# Altium PCB busanaliz02.PcbDoc (part 2 of 2)
Units mm, origin at the board's own origin, x right, y up, seen from the top; angles counter-clockwise.
Board outline 118.11 x 70.87 mm, 4 copper layers (Component Side, Ground Plane, Power Plane, Solder Side), stack 0.844 mm thick; 98 components, 86 nets, 476 pads, 172 vias.
Unrouted connection lines stored in the file: 1.
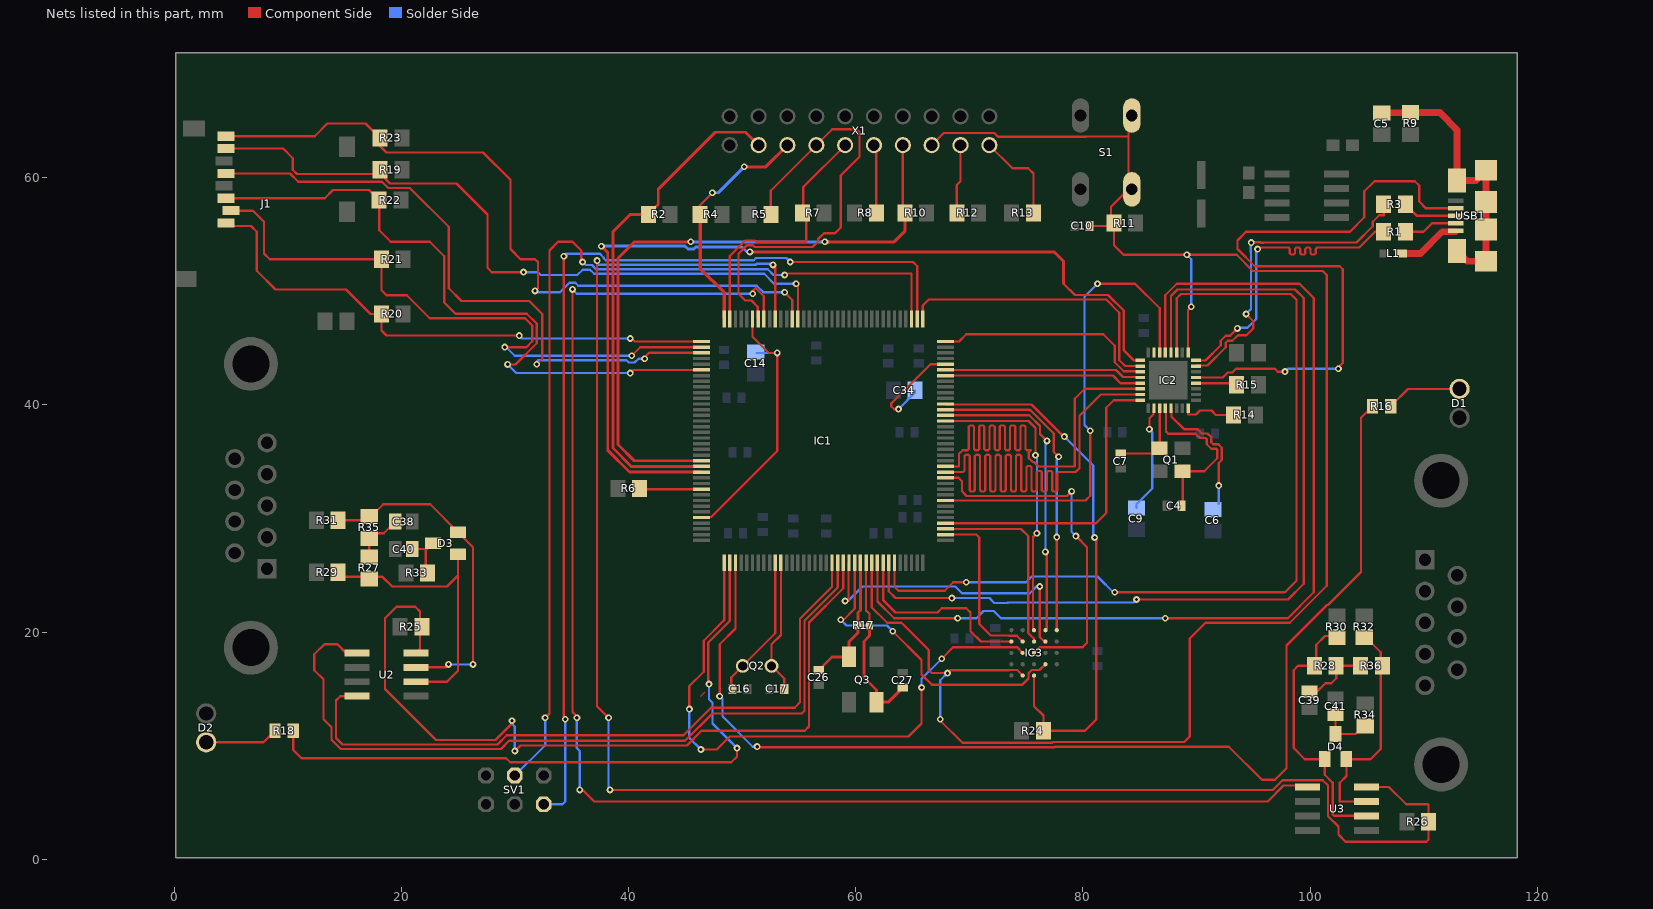
[diagram p4: the nets of this part, all layers, seen from the top]

## Via types
v1: diameter 0.6, hole 0.3, Component Side to Solder Side, 172 vias

## Nets (pads, with @x,y where several pads share a name; then routed paths per layer and width w, separated by ;. In a path a pad name is that pad's centre, name@x,y a point inside that pad or via, vN(x,y) a via of type N, cw(c..) or ccw(c..) an arc to the next point about the centre after c; other vN are vias at no path point) (continued)
FD1_CANTX: IC1.101 U3.1 | length 129.3
  Component Side w0.2: v1(35.052,50.165) 35.052,12.954 35.433,12.573 v1(35.433,12.446) ; v1(35.687,6.096) 35.941,6.096 36.957,5.08 96.266,5.08 97.663,6.477 U3.1@99.635,6.477 ; v1(50.927,49.784) 50.927,50.038 51.181,50.292 51.9,49.573 IC1.101@51.9,47.568
  Solder Side w0.2: v1(35.052,50.165) 34.925,50.292 35.433,49.784 v1(50.927,49.784) ; v1(35.433,12.446) 35.433,9.779 35.687,9.525 v1(35.687,6.096)
FD1_STBM: IC1.99 R26.1 U3.8 | length 154.1
  Component Side w0.2: v1(37.211,52.705) 37.211,13.462 v1(38.227,12.446) v1@38.227,12.573 ; v1(38.354,6.096) 96.716,6.096 97.575,6.955 101.122,6.955 101.581,6.496 101.581,3.771 102.489,2.863 102.489,2.159 103.124,1.524 110.236,1.524 110.424,1.712 R26.1@110.424,3.302 110.424,4.765 110.363,4.826 108.458,4.826 106.934,6.35 U3.8@104.978,6.35 ; v1(52.705,52.324) 52.705,52.451 52.9,52.256 IC1.99@52.9,47.568
  Solder Side w0.2: v1(37.211,52.705) 37.211,52.451 37.322,52.34 51.18,52.34 51.275,52.435 52.594,52.435 v1(52.705,52.324) ; v1(38.227,12.446) 38.227,6.223 v1(38.354,6.096)
FD2_CANRX: IC1.20 U2.4 | length 61.4
  Component Side w0.2: U2.4@16.069,14.351 14.605,14.351 14.224,13.97 14.224,10.668 14.797,10.095 28.441,10.095 29.249,10.903 44.812,10.903 47.244,13.335 54.61,13.335 55.08,13.805 55.08,21.159 57.9,23.979 IC1.20@57.9,26.092
FD2_CANTX: IC1.21 U2.1 | length 69.2
  Component Side w0.2: 13.808,11.635 13.116,12.327 13.116,15.84 12.319,16.637 12.319,18.034 13.208,18.923 14.351,18.923 U2.1@15.113,18.161 ; 13.824,11.619 13.824,10.502 14.631,9.695 28.745,9.695 29.464,10.414 44.958,10.414 47.371,12.827 55.245,12.827 55.48,13.062 55.48,20.994 58.4,23.914 IC1.21@58.4,26.092
FD2_STBM: IC1.22 R25.1 U2.8 | length 72.9
  Component Side w0.2: U2.8@21.285,18.161 21.628,18.504 21.628,21.806 21.209,22.225 19.558,22.225 18.542,21.209 18.542,14.979 23.026,10.495 28.275,10.495 29.718,11.938 v1(29.718,12.192) ; v1(29.972,9.525) 30.461,10.014 45.124,10.014 46.413,11.303 55.499,11.303 55.88,11.684 55.88,20.828 58.9,23.848 IC1.22@58.9,26.092
  Solder Side w0.2: v1(29.718,12.192) 29.591,12.065 29.972,11.684 v1(29.972,9.525)
JNTRST: IC1.131 R2.1 X1.3 | length 45.2
  Component Side w0.254: IC1.131@46.412,34.58 40.223,34.58 38.608,36.195 38.608,55.245 40.132,56.769 R2.1@41.722,56.769 42.596,57.643 42.596,58.979 47.625,64.008 50.292,64.008 X1.3@51.435,62.865
JTCLK: IC1.107 R7.2 X1.9 | length 22.5
  Component Side w0.2: IC1.107@48.9,47.568 48.9,53.108 50.259,54.467 51.087,54.467 51.198,54.356 55.626,54.356 R7.2@55.626,56.566 ; R7.2@55.372,56.972 55.372,59.182 X1.9@59.055,62.865
JTDI: IC1.108 R4.1 X1.5 | length 20.7
  Component Side w0.2: R4.1@46.482,56.957 46.228,57.211 46.228,57.531 v1(47.371,58.674)
  Component Side w0.254: v1(50.165,60.96) 52.07,60.96 X1.5@53.975,62.865
  Component Side w0.3: R4.1@46.294,56.769 46.294,52.004 48.4,49.898 IC1.108@48.4,47.568
  Solder Side w0.2: v1(47.371,58.674) 47.879,58.674
  Solder Side w0.254: 47.879,58.674 v1(50.165,60.96)
JTDO: IC1.130 R10.2 X1.13 | length 58.7
  Component Side w0.2: X1.13@64.135,62.865 64.135,57.074 R10.2@64.313,56.896
  Component Side w0.254: v1@45.593,54.356 v1(45.466,54.356) 40.513,54.356 39.062,52.905 39.062,36.503 40.485,35.08 IC1.130@46.412,35.08 ; v1(57.277,54.356) 63.373,54.356 64.313,55.296 R10.2@64.313,56.896
  Solder Side w0.254: v1(45.466,54.356) v1(57.277,54.356) 57.658,54.356
JTMS: IC1.102 R5.1 X1.7 | length 38.3
  Component Side w0.2: IC1.102@51.4,47.568 51.35,47.618 51.35,48.647 50.813,49.184 50.257,49.184 49.657,49.784 49.657,53.3 50.424,54.067 50.922,54.067 51.095,53.894 56.18,53.894 56.677,54.391 56.677,54.605 57.19,55.118 58.166,55.118 58.674,55.626 58.674,60.198 60.325,61.849 60.325,64.008 60.071,64.262 57.912,64.262 X1.7@56.515,62.865 52.512,58.862 R5.1@52.512,56.769
LED0: IC1.3 R16.1 | length 101.7
  Component Side w0.2: v1(48.006,14.351) 48.006,18.923 49.4,20.317 IC1.3@49.4,26.092 ; v1(51.308,9.906) 51.373,9.841 77.465,9.841 77.53,9.906 92.837,9.906 95.758,6.985 96.901,6.985 97.917,8.001 97.917,18.814 101.476,22.373 101.58,22.373 104.486,25.278 104.486,38.865 R16.1@105.499,39.878
  Solder Side w0.2: v1(48.006,14.351) 48.26,14.097 48.26,12.573 50.927,9.906 v1(51.308,9.906)
LED1: IC1.2 R18.1 | length 60.3
  Component Side w0.2: R18.1@10.452,11.303 10.452,9.614 11.176,8.89 29.193,8.89 29.558,8.525 49.038,8.525 49.53,9.017 v1(49.53,9.779) ; v1(47.068,15.416) 47.009,15.475 47.009,19.069 48.9,20.96 IC1.2@48.9,26.092
  Solder Side w0.2: v1(47.068,15.416) 47.068,14.077 47.371,13.774 47.371,11.938 v1(49.53,9.779)
NetC4_2: C4.2 IC2.28 Q1.3 | length 14.7
  Component Side w0.2: IC2.28@87.253,39.714 87.303,39.664 87.303,37.665 87.503,37.465 89.916,37.465 90.297,37.084 90.805,37.084 90.892,36.997 90.892,36.54 91.302,36.13 91.759,36.13 91.821,36.068 91.821,35.306 90.678,34.163 Q1.3@88.773,34.163 C4.2@88.773,31.217
NetC5_1: C5.1 R9.2 USB1.PAD1 USB1.PAD2 USB1.PAD3 USB1.PAD4 USB1.PAD5 USB1.PAD6 | length 25.6
  Component Side w0.6: C5.1@106.299,65.72 108.824,65.72 R9.2@108.839,65.735 111.43,65.735 112.941,64.224 USB1.PAD2@112.941,59.766 114.602,59.766 USB1.PAD6@115.491,60.655 USB1.PAD5@115.491,57.861 USB1.PAD4@115.491,55.442 USB1.PAD3@115.491,52.642 113.841,52.642 USB1.PAD1@112.941,53.542
NetC6_1: C6.1 IC2.29 | length 11.6
  Component Side w0.2: IC2.29@87.753,39.714 87.803,39.664 87.803,38.948 88.886,37.865 90.082,37.865 90.463,37.484 90.971,37.484 91.292,37.162 91.292,36.706 91.468,36.53 91.925,36.53 92.221,36.234 92.221,35.14 91.948,34.867 v1(91.948,32.893)
  Solder Side w0.2: C6.1@91.948,31.303 v1(91.948,32.893)
NetC7_2: C7.2 IC2.27 Q1.1 | length 7.1
  Component Side w0.2: C7.2@83.312,35.712 86.143,35.712 86.753,36.322 IC2.27@86.753,39.714
NetC9_1: C9.1 IC2.26 | length 9.6
  Component Side w0.2: v1(85.852,37.846) 85.852,38.814 86.203,39.165 IC2.26@86.203,39.664
  Solder Side w0.2: C9.1@84.709,30.922 84.709,31.242 86.106,32.639 86.106,37.592 v1(85.852,37.846)
NetC16_2: C16.2 IC1.10 Q2.2 | length 12.8
  Component Side w0.2: C16.2@49.124,14.986 49.022,15.088 49.022,16.002 Q2.2@50.038,17.018 52.9,19.88 IC1.10@52.9,26.092
NetC17_2: C17.2 IC1.11 Q2.1 | length 11.9
  Component Side w0.2: IC1.11@53.4,26.092 53.4,19.745 52.578,18.923 Q2.1@52.578,17.018 53.695,15.901 C17.2@53.695,14.986
NetC26_1: C26.1 IC1.25 Q3.P$1 R17.2 | length 11.8
  Component Side w0.254: C26.1@56.743,16.652 57.899,17.808 Q3.P$1@59.411,17.808 59.411,19.152 60.198,19.939 R17.2@60.198,20.574 60.198,21.717 60.4,21.919 IC1.25@60.4,26.092
NetC27_1: C27.1 IC1.26 Q3.P$3 R17.1 | length 15.9
  Component Side w0.2: IC1.26@60.9,26.092 60.9,21.904 61.206,21.598 R17.1@61.206,20.574
  Component Side w0.254: R17.1@61.206,20.574 61.206,19.677 60.706,19.177 60.706,16.002 61.824,14.884 Q3.P$3@61.824,13.821 62.858,13.821 C27.1@64.135,15.098
NetC34_1: C34.1 IC1.68 | length 9.4
  Component Side w0.2: v1(63.754,39.624) 63.373,39.624 63.119,39.878 63.119,40.132 66.567,43.58 IC1.68@67.888,43.58
  Solder Side w0.2: v1(63.754,39.624) 65.212,41.082 C34.1@65.212,41.275
NetC38_1: C38.1 R27.1 R35.2 | length 4.7
  Component Side w0.2: R27.1@17.145,26.454 R27.1@17.145,26.604 R35.2@17.145,28.245 17.602,28.702 18.427,28.702 C38.1@19.443,29.718
NetC39_1: C39.1 R28.1 R36.2 | length 6.2
  Component Side w0.2: C39.1@99.949,14.72 100.572,14.72 101.346,15.494 101.854,15.494 102.296,15.936 R28.1@102.296,17.018 R36.2@104.445,17.018 R36.2@104.61,17.018
NetC40_1: C40.1 D3.3 R33.2 | length 3.9
  Component Side w0.2: C40.1@20.543,27.305 22.25,27.305 22.136,27.191 R33.2@22.136,25.199
NetC41_1: C41.1 D4.3 R34.2 | length 4.7
  Component Side w0.2: C41.1@102.235,12.712 D4.3@102.235,11.024 103.988,11.024 R34.2@104.864,11.9
NetD1_1: D1.1 R16.2 | length 6.7
  Component Side w0.2: R16.2@107.099,39.878 108.623,41.402 D1.1@113.157,41.402
NetD2_1: D2.1 R18.2 | length 6.5
  Component Side w0.2: D2.1@2.794,10.287 7.836,10.287 R18.2@8.852,11.303
NetD3_1: D3.1 R27.2 R29.1 U2.6 | length 26
  Component Side w0.2: R29.1@14.262,25.273 14.262,25.235 14.643,24.854 17.145,24.854 18.326,24.854 19.177,24.003 24.003,24.003 24.976,24.976 ; U2.6@21.285,15.621 24.003,15.621 24.976,16.594 24.976,24.976 ; D3.1@24.976,26.863 24.976,24.976
NetD3_2: D3.2 R31.1 R35.1 U2.7 | length 29.6
  Component Side w0.2: R31.1@14.262,29.845 R31.1@14.412,29.845 16.98,29.845 18.377,31.242 22.512,31.242 D3.2@24.976,28.778 26.289,27.465 v1(26.289,17.145) ; U2.7@21.285,16.891 23.876,16.891 v1(24.13,17.145)
  Solder Side w0.2: v1(24.13,17.145) v1(26.289,17.145)
NetD4_1: D4.1 R28.2 R30.1 U3.6 | length 24.3
  Component Side w0.2: R28.2@100.381,17.018 98.933,17.018 98.552,16.637 98.552,9.779 99.525,8.806 D4.1@101.285,8.806 101.285,7.427 101.981,6.731 101.981,3.937 102.108,3.81 U3.6@104.978,3.81 ; R28.2@100.546,17.018 100.546,18.885 101.308,19.647 102.362,19.647 R30.1@102.362,19.558
NetD4_2: D4.2 R32.1 R36.1 U3.7 | length 20.3
  Component Side w0.2: R32.1@104.775,19.647 106.21,18.212 106.21,9.69 105.326,8.806 D4.2@103.2,8.806 103.2,7.315 102.616,6.731 102.616,5.08 U3.7@104.978,5.08
NetIC1_135: IC1.135 R6.2 | length 5.5
  Component Side w0.2: R6.2@40.97,32.639 41.029,32.58 IC1.135@46.412,32.58
NetIC2_4: IC2.4 R15.2 | length 3.4
  Component Side w0.2: IC2.4@89.953,41.914 R15.2@93.392,41.914
NetIC2_32: IC2.32 R14.2 | length 4.9
  Component Side w0.2: IC2.32@89.253,39.714 89.253,39.144 89.944,39.144 90.297,39.497 91.313,39.497 91.694,39.116 R14.2@93.269,39.116
NetL1_1: L1.1 USB1.V | length 5.5
  Component Side w0.6: L1.1@108.09,53.34 109.728,53.34 111.633,55.245 USB1.V@112.821,55.245
NetR1_1: R1.1 USB1.D- | length 4.7
  Component Side w0.2: R1.1@108.392,55.245 109.982,55.245 110.739,56.002 USB1.D-@112.821,56.002
NetR3_1: R3.1 USB1.D+ | length 4.8
  Component Side w0.2: R3.1@108.392,57.658 109.408,56.642 USB1.D+@112.821,56.642
NetR8_2: R8.2 X1.11 | length 6.1
  Component Side w0.2: X1.11@61.595,62.865 61.798,62.662 R8.2@61.798,56.896
NetR12_2: R12.2 X1.17 | length 6.1
  Component Side w0.2: R12.2@68.885,56.896 68.885,59.36 69.215,59.69 X1.17@69.215,62.865
NetR13_2: R13.2 X1.19 | length 8.4
  Component Side w0.2: X1.19@71.755,62.865 73.787,60.833 75.184,60.833 75.641,60.376 R13.2@75.641,56.896
OCTO_CLK: IC1.24 IC3.B2 | length 27.9
  Component Side w0.2: v1(58.674,21.082) 58.801,20.955 59.909,22.063 59.909,26.083 IC1.24@59.9,26.092 ; v1(63.246,20.066) 65.786,17.526 65.786,16.256 66.675,15.367 74.676,15.367 75.207,15.898 75.207,16.362 75.491,16.646 76.177,16.646 IC3.B2@76.692,17.161
  Solder Side w0.2: v1(58.674,21.082) 59.182,20.574 62.738,20.574 v1(63.246,20.066)
OCTO_DQS: IC1.48 IC3.C3 | length 31.4
  Component Side w0.2: IC1.48@67.888,33.58 69.036,33.58 69.342,33.274 69.342,32.385 69.747,31.98 78.589,31.98 v1(78.994,32.385) ; IC3.C3@75.692,18.161 76.2,18.669 79.97,18.669 80.356,19.055 80.356,27.467 v1(79.375,28.448)
  Solder Side w0.2: v1(78.994,32.385) 78.994,28.829 v1(79.375,28.448)
OCTO_IO0: IC1.39 IC3.D3 | length 17.1
  Component Side w0.2: IC1.39@67.888,29.08 74.552,29.08 75.184,28.448 75.184,19.921 75.692,19.413 IC3.D3@75.692,19.161
OCTO_IO1: IC1.23 IC3.D2 | length 26.8
  Component Side w0.2: v1(59.055,22.733) 59.309,22.733 59.35,22.774 IC1.23@59.35,26.042 ; v1(76.2,24.003) 76.2,19.558 76.597,19.161 IC3.D2@76.692,19.161
  Solder Side w0.2: v1(59.055,22.733) 59.309,22.733 60.579,24.003 68.747,24.003 69.347,23.403 75.317,23.403 75.917,24.003 v1(76.2,24.003)
OCTO_IO2: IC1.1 IC3.C4 | length 53.4
  Component Side w0: 46.355,14.351 46.736,14.732
  Component Side w0.2: v1(45.339,13.208) 45.339,15.24 46.609,16.51 46.609,19.235 48.4,21.026 IC1.1@48.4,26.092 ; v1(46.355,9.652) 47.752,9.652 48.895,10.795 64.643,10.795 65.786,11.938 v1(65.786,15.113) ; v1@67.437,17.526 v1(67.564,17.653) 68.58,18.669 74.184,18.669 IC3.C4@74.692,18.161
  Solder Side w0.2: v1(45.339,13.208) 45.339,10.668 v1(46.355,9.652) ; v1(65.786,15.113) 65.786,15.875 v1(67.564,17.653)
OCTO_IO3: IC1.38 IC3.D4 | length 15.2
  Component Side w0.2: IC1.38@67.888,28.58 70.607,28.58 70.866,28.321 70.866,20.701 71.882,19.685 73.482,19.685 73.491,19.676 74.177,19.676 IC3.D4@74.692,19.161
OCTO_IO4: IC1.29 IC3.D5 | length 17.4
  Component Side w0.2: IC1.29@62.4,26.092 62.4,22.817 63.5,21.717 67.183,21.717 67.564,22.098 69.723,22.098 70.104,21.717 70.104,20.066 71.009,19.161 IC3.D5@73.692,19.161
OCTO_IO5: IC1.58 IC3.E3 | length 26.5
  Component Side w0.2: IC1.58@67.888,38.58 75.212,38.58 75.819,37.973 v1(75.819,35.56) ; IC3.E3@75.692,20.161 75.6,20.253 75.6,28.356 v1(75.946,28.702)
  Solder Side w0.2: v1(75.819,35.56) 75.946,35.687 v1(75.946,28.702)
OCTO_IO6: IC1.59 IC3.E2 | length 27.1
  Component Side w0.2: IC1.59@67.888,39.08 75.278,39.08 76.219,38.139 76.219,37.446 v1(76.835,36.83) ; IC3.E2@76.692,20.161 76.8,20.269 76.8,26.943 v1(76.692,27.051)
  Solder Side w0.2: v1(76.692,27.051) 76.692,36.687 v1(76.835,36.83)
OCTO_IO7: IC1.60 IC3.E1 | length 28.2
  Component Side w0.2: IC1.60@67.888,39.58 75.343,39.58 77.435,37.488 77.435,35.849 v1(77.851,35.433) ; IC3.E1@77.692,20.161 v1(77.692,28.353)
  Solder Side w0.2: v1(77.692,28.353) 77.692,35.147 77.978,35.433 v1(77.851,35.433)
OCTO_NCS: IC1.61 IC3.A3 R24.1 | length 48.1
  Component Side w0.2: IC1.61@67.888,40.08 67.938,40.03 75.459,40.03 78.151,37.338 78.359,37.338 v1(78.359,37.211) ; IC3.A3@75.692,16.161 75.692,13.462 76.515,12.639 R24.1@76.515,11.303 80.175,11.303 81.172,12.3 81.172,28.175 v1(81.026,28.321)
  Solder Side w0.2: v1(78.359,37.211) 80.899,34.671 80.899,28.448 v1(81.026,28.321)
RESET: C10.1 IC1.27 IC2.9 IC3.A4 R11.2 S1.3 S1.4 X1.15 | length 159.4
  Component Side w0.2: IC1.27@61.4,26.092 61.4,22.166 62.757,20.809 64.027,20.809 66.421,18.415 66.421,16.637 66.675,16.383 v1(68.072,16.383) 68.326,16.637 73.482,16.637 73.491,16.646 74.207,16.646 IC3.A4@74.692,16.161 ; X1.15@66.675,62.865 67.74,63.93 72.196,63.93 72.523,63.603 80.244,63.603 80.267,63.627 83.998,63.627 ; v1(67.437,12.319) 67.437,12.192 69.388,10.241 77.3,10.241 77.365,10.306 88.919,10.306 89.408,10.795 89.408,19.431 90.786,20.809 98.21,20.809 101.473,24.072 101.473,51.435 101.111,51.797 94.957,51.797 93.541,53.213 v1(89.154,53.213) 83.566,53.213 82.728,54.051 R11.2@82.728,56.007 ; C10.1@80.584,55.753 82.474,55.753 82.474,57.455 83.998,58.979 83.998,63.627 ; S1.4@84.303,65.481 83.998,65.176 83.998,63.627 ; IC2.9@89.253,44.614 89.253,48.359 v1(89.535,48.641)
  Solder Side w0.2: v1(67.437,12.319) 67.437,15.748 v1(68.072,16.383) ; v1(89.154,53.213) 89.535,52.832 v1(89.535,48.641)
SD_CLK: IC1.111 J1.5 | length 56.1
  Component Side w0.2: J1.5@4.552,60.382 10.173,60.382 10.91,59.644 18.276,59.644 18.819,59.101 20.728,59.101 24.149,55.68 24.149,50.273 25.273,49.149 31.242,49.149 32.385,48.006 32.385,44.069 v1(31.896,43.58) ; v1(41.402,44.069) 41.402,44.196 41.786,44.58 IC1.111@46.412,44.58
  Solder Side w0.2: v1(31.896,43.58) 31.896,43.815 32.004,43.923 39.81,43.923 40.01,43.723 40.508,43.723 40.854,44.069 v1(41.402,44.069)
SD_CMD: IC1.114 J1.3 R22.1 | length 59
  Component Side w0.2: J1.3@4.552,58.197 13.239,58.197 13.97,58.928 17.14,58.928 R22.1@18.029,58.039 18.029,55.377 19.05,54.356 22.479,54.356 23.749,53.086 23.749,49.022 24.746,48.025 31.027,48.025 31.896,47.156 31.896,45.427 30.03,43.561 v1(29.337,43.561) ; v1(40.132,42.799) 40.413,43.08 IC1.114@46.412,43.08
  Solder Side w0.2: v1(29.337,43.561) 30.099,42.799 v1(40.132,42.799)
SD_D0: IC1.95 J1.7 R19.1 | length 62.3
  Component Side w0.2: J1.7@4.552,62.566 9.57,62.566 10.414,61.722 10.414,60.706 10.795,60.325 18.161,60.325 18.985,59.501 24.827,59.501 27.559,56.769 27.559,52.07 27.94,51.689 v1(30.734,51.689) ; v1(54.737,50.673) 54.737,50.8 54.9,50.637 IC1.95@54.9,47.568
  Solder Side w0.2: v1(30.734,51.689) 32.004,51.689 32.258,51.435 35.473,51.435 35.946,51.908 36.594,51.908 36.962,51.54 51.925,51.54 52.792,50.673 v1(54.737,50.673)
SD_D1: IC1.96 J1.8 R23.1 | length 64.9
  Component Side w0.2: J1.8@4.552,63.658 12.35,63.658 13.462,64.77 16.83,64.77 R23.1@18.1,63.5 18.1,62.799 18.669,62.23 27.178,62.23 29.591,59.817 29.591,53.721 30.48,52.832 31.75,52.832 32.004,52.578 32.004,50.292 v1(31.75,50.038) ; v1(53.721,49.911) 54.4,49.232 IC1.96@54.4,47.568
  Solder Side w0.2: v1(31.75,50.038) 31.877,49.911 33.949,49.911 34.803,50.765 35.301,50.765 35.566,50.5 51.267,50.5 51.856,49.911 v1(53.721,49.911)
SD_D2: IC1.109 J1.1 R20.1 | length 49.2
  Component Side w0.2: J1.1@4.552,56.013 4.812,55.753 6.731,55.753 7.239,55.245 7.239,51.816 8.89,50.165 15.113,50.165 17.272,48.006 R20.1@18.227,48.006 18.227,46.543 18.669,46.101 v1(30.353,46.101) ; v1(40.132,45.847) 40.132,45.974 40.526,45.58 IC1.109@46.412,45.58
  Solder Side w0.2: v1(30.353,46.101) 30.607,45.847 v1(40.132,45.847)
SD_D3: IC1.110 J1.2 R21.1 | length 55.9
  Component Side w0.2: J1.2@4.959,57.105 6.903,57.105 7.874,56.134 7.874,53.34 8.382,52.832 R21.1@18.227,52.832 18.227,50.099 18.669,49.657 20.447,49.657 22.479,47.625 30.861,47.625 31.496,46.99 31.496,45.593 30.988,45.085 v1(29.083,45.085) ; v1(40.259,44.323) 41.016,45.08 IC1.110@46.412,45.08
  Solder Side w0.2: v1(29.083,45.085) 29.21,45.085 29.972,44.323 v1(40.259,44.323)
ULPI_CK: IC1.44 IC2.14 | length 42.5
  Component Side w0.2: IC1.44@67.888,31.58 80.221,31.58 80.645,32.004 v1(80.645,37.719) ; v1(81.28,50.673) 84.582,50.673 86.753,48.502 IC2.14@86.753,44.614
  Solder Side w0.2: v1(80.645,37.719) 80.137,38.227 80.137,49.53 v1(81.28,50.673)
ULPI_D0: IC1.40 IC2.24 | length 27.1
  Component Side w0.2: IC1.40@67.888,29.58 81.142,29.58 82.042,30.48 82.042,39.751 82.705,40.414 IC2.24@85.053,40.414
ULPI_D1: IC1.49 IC2.23 | length 70.6
  Component Side w0.2: IC1.49@67.888,34.08 69.342,34.08 69.455,34.08 69.569,34.194 69.569,35.495 69.682,35.609 69.909,35.609 70.023,35.495 70.023,34.08 70.023,32.493 70.136,32.38 70.363,32.38 70.477,32.493 70.477,34.08 70.477,35.495 70.59,35.609 70.817,35.609 70.931,35.495 70.931,34.08 70.931,32.493 71.044,32.38 71.271,32.38 71.385,32.493 71.385,34.08 71.385,35.495 71.498,35.609 71.725,35.609 71.839,35.495 71.839,34.08 71.839,32.493 71.952,32.38 72.179,32.38 72.293,32.493 72.293,34.08 72.293,35.495 72.406,35.609 72.633,35.609 72.747,35.495 72.747,34.08 72.747,32.493 72.86,32.38 73.087,32.38 73.201,32.493 73.201,34.08 73.201,35.495 73.314,35.609 73.541,35.609 73.655,35.495 73.655,34.08 73.655,32.493 73.768,32.38 73.995,32.38 74.109,32.493 74.109,34.08 74.109,35.495 74.222,35.609 74.449,35.609 74.563,35.495 74.563,34.08 74.563,32.493 74.676,32.38 74.903,32.38 75.017,32.493 75.017,34.08 75.017,34.508 75.13,34.621 75.357,34.621 75.471,34.508 75.471,34.08 75.471,32.493 75.584,32.38 75.811,32.38 75.925,32.493 75.925,34.08 76.025,34.18 76.279,34.18 76.379,34.08 76.379,32.493 76.492,32.38 76.719,32.38 76.833,32.493 76.833,34.08 76.933,34.18 77.187,34.18 77.287,34.08 77.287,32.493 77.4,32.38 77.627,32.38 77.741,32.493 77.741,33.967 77.854,34.08 77.978,34.08 79.35,34.08 79.684,34.414 79.684,39.044 81.554,40.914 IC2.23@85.053,40.914
ULPI_D2: IC1.50 IC2.22 | length 50.5
  Component Side w0.2: IC1.50@67.888,34.58 69.088,34.58 69.088,35.687 69.41,36.009 69.723,36.009 69.836,36.009 69.95,36.122 69.95,38.067 70.063,38.18 70.29,38.18 70.404,38.067 70.404,36.122 70.517,36.009 70.744,36.009 70.858,36.122 70.858,38.067 70.971,38.18 71.198,38.18 71.312,38.067 71.312,36.122 71.425,36.009 71.652,36.009 71.766,36.122 71.766,38.067 71.879,38.18 72.106,38.18 72.22,38.067 72.22,36.122 72.333,36.009 72.56,36.009 72.674,36.122 72.674,38.067 72.787,38.18 73.014,38.18 73.128,38.067 73.128,36.122 73.241,36.009 73.468,36.009 73.582,36.122 73.582,38.067 73.695,38.18 73.922,38.18 74.036,38.067 74.036,36.122 74.149,36.009 74.376,36.009 74.49,36.122 74.49,38.067 74.603,38.18 74.83,38.18 74.944,38.067 74.944,36.122 75.057,36.009 75.219,36.009 75.419,36.009 75.219,35.809 75.219,35.311 75.57,34.96 75.693,34.96 76.073,34.58 79.284,34.58 79.284,40.549 80.149,41.414 IC2.22@85.053,41.414
ULPI_D3: IC1.66 IC2.21 | length 17.4
  Component Side w0.2: IC1.66@67.888,42.58 82.642,42.58 83.308,41.914 IC2.21@85.053,41.914
ULPI_D4: IC1.67 IC2.20 | length 17.4
  Component Side w0.2: IC1.67@67.888,43.08 82.916,43.08 83.532,42.464 IC2.20@85.003,42.464
ULPI_D5: IC1.72 IC2.19 | length 19.7
  Component Side w0.2: IC1.72@67.888,45.58 69.075,45.58 69.723,46.228 81.788,46.228 82.801,45.215 82.801,43.76 83.597,42.964 85.003,42.964 IC2.19@85.053,42.914
ULPI_D6: IC1.73 IC2.18 | length 25.4
  Component Side w0.2: IC1.73@65.9,47.568 65.9,48.755 66.421,49.276 82.042,49.276 83.201,48.117 83.201,43.926 83.713,43.414 IC2.18@85.053,43.414
ULPI_D7: IC1.132 IC2.17 | length 82.3
  Component Side w0.2: 78.294,50.673 79.291,49.676 82.208,49.676 83.601,48.283 83.601,44.796 84.483,43.914 IC2.17@85.053,43.914
  Component Side w0.254: v1(37.592,53.975) 38.154,53.413 38.154,36.007 40.081,34.08 IC1.132@46.412,34.08 ; v1(50.673,53.467) 77.47,53.467 78.294,52.643 78.294,50.673
  Solder Side w0.254: v1(37.592,53.975) 44.96,53.975 45.206,53.729 45.726,53.729 45.899,53.902 49.984,53.902 50.546,53.34 v1(50.673,53.467)
ULPI_DIR: IC1.30 IC2.12 | length 82.5
  Component Side w0.2: IC1.30@62.9,26.092 62.9,23.587 63.5,22.987 v1(68.453,22.987) ; v1(84.709,22.86) 98.044,22.86 99.441,24.257 99.441,49.403 98.679,50.165 88.323,50.165 87.753,49.595 IC2.12@87.753,44.614
  Solder Side w0.2: v1(68.453,22.987) 71.763,22.987 72.19,22.56 73.352,22.56 73.398,22.606 84.455,22.606 v1(84.709,22.86)
ULPI_NXT: IC1.31 IC2.11 | length 79.8
  Component Side w0.2: IC1.31@63.4,26.092 63.4,23.976 63.754,23.622 67.818,23.622 68.58,24.384 v1(69.723,24.384) ; v1(82.804,23.495) 97.79,23.495 98.806,24.511 98.806,49.257 98.298,49.765 88.627,49.765 88.253,49.391 IC2.11@88.253,44.614
  Solder Side w0.2: v1(69.723,24.384) 74.97,24.384 75.478,24.892 81.28,24.892 82.804,23.368 v1(82.804,23.495)
ULPI_STP: IC1.28 IC2.13 | length 88.9
  Component Side w0.2: IC1.28@61.9,26.092 61.9,22.682 63.373,21.209 v1(68.961,21.209) ; v1(87.249,21.209) 98.044,21.209 100.33,23.495 100.33,49.403 99.06,50.673 88.265,50.673 87.253,49.661 IC2.13@87.253,44.614
  Solder Side w0.2: v1(68.961,21.209) 70.612,21.209 71.247,21.844 72.136,21.844 72.771,21.209 v1(87.249,21.209)
USART_RX: IC1.75 SV1.3 | length 86
  Component Side w0.2: v1(32.639,12.446) 33.02,12.827 33.02,53.594 33.782,54.356 35.052,54.356 35.814,53.594 35.814,52.451 v1(35.941,52.578) ; v1(53.721,51.435) 53.594,51.435 53.718,51.559 64.9,51.559 IC1.75@64.9,47.568
  Solder Side w0.2: SV1.3@29.972,7.366 32.639,10.033 v1(32.639,12.446) ; v1(35.941,52.578) 36.211,52.308 36.759,52.308 37.127,51.94 52.24,51.94 52.745,51.435 v1(53.721,51.435)
USART_TX: IC1.74 SV1.2 | length 86.9
  Component Side w0.2: v1(34.29,53.086) 34.29,12.573 34.544,12.319 v1(34.417,12.319) ; v1(54.229,52.578) 65.024,52.578 65.4,52.202 IC1.74@65.4,47.568
  Solder Side w0.2: SV1.2@32.512,4.826 34.163,4.826 34.417,5.08 v1(34.417,12.319) ; v1(34.29,53.086) 34.509,53.305 37.46,53.305 37.811,52.954 37.811,52.907 37.978,52.74 51.014,52.74 51.198,52.924 53.883,52.924 v1(54.229,52.578) v1@54.062,52.578
USB_OTG_HS_DM: IC2.8 R1.2 | length 27.8
  Component Side w0.2: IC2.8@89.953,43.914 90.777,43.914 92.124,45.261 92.124,45.651 92.565,46.093 92.956,46.093 v1(93.599,46.736) ; v1(95.377,53.721) 95.504,53.848 97.536,53.848 97.763,53.848 98.103,53.848 98.217,53.735 98.217,53.359 98.33,53.246 98.557,53.246 98.671,53.359 98.671,53.735 98.784,53.848 99.011,53.848 99.125,53.735 99.125,53.359 99.238,53.246 99.465,53.246 99.579,53.359 99.579,53.735 99.692,53.848 99.919,53.848 100.033,53.735 100.033,53.359 100.146,53.246 100.373,53.246 100.487,53.359 100.487,53.735 100.6,53.848 100.941,53.848 101.395,53.848 101.413,53.848 104.319,53.848 105.716,55.245 R1.2@106.477,55.245
  Solder Side w0.2: v1(93.599,46.736) 93.653,46.79 94.476,46.79 95.25,47.564 95.25,53.594 v1(95.377,53.721)
USB_OTG_HS_DP: IC2.7 R3.2 | length 28.8
  Component Side w0.2: IC2.7@89.953,43.414 89.999,43.46 90.965,43.46 92.578,45.073 92.578,45.463 92.753,45.639 93.144,45.639 93.641,46.136 94.396,46.136 94.996,46.736 94.996,47.371 v1(94.361,48.006) ; v1(94.811,54.287) 94.846,54.321 95.626,54.321 95.66,54.287 95.87,54.287 95.885,54.302 104.086,54.302 105.516,55.732 105.516,56.131 106.078,56.693 106.477,56.693 R3.2@106.477,57.658
  Solder Side w0.2: v1@94.361,47.752 v1(94.361,48.006) 94.796,48.441 94.796,53.453 94.777,53.472 94.777,54.252 v1(94.811,54.287)
USB_OTG_HS_ID: IC2.5 USB1.ID | length 57.3
  Component Side w0.2: IC2.5@89.953,42.414 92.307,42.414 92.738,42.845 93.137,42.845 93.472,43.18 96.901,43.18 97.155,42.926 v1(97.79,42.926) ; v1(102.489,43.18) 102.616,43.307 102.616,43.434 102.87,43.688 102.87,51.943 102.616,52.197 95.123,52.197 93.599,53.721 93.599,54.483 94.361,55.245 103.505,55.245 104.775,56.515 104.775,58.801 105.664,59.69 109.22,59.69 109.601,59.309 109.601,57.912 110.211,57.302 USB1.ID@112.821,57.302
  Solder Side w0.2: v1(97.79,42.926) 98.044,43.18 v1(102.489,43.18)
VCAP2: C14.1 IC1.103 IC1.140 | length 23.9
  Component Side w0.2: IC1.140@46.412,30.08 46.462,30.13 47.274,30.13 53.086,35.942 v1(53.086,44.577) 52.324,44.577 50.9,46.001 IC1.103@50.9,47.568
  Solder Side w0.2: C14.1@51.242,44.577 v1(53.086,44.577)
VDD18_1: IC2.15
pads on no net: IC1.4 IC1.5 IC1.9 IC1.37 IC1.43 IC1.45 IC1.46 IC1.47 IC1.51 IC1.52 IC1.53 IC1.54 IC1.57 IC1.62 IC1.63 IC1.64 IC1.65 IC1.76 IC1.77 IC1.78 IC1.81 IC1.82 IC1.83 IC1.84 IC1.85 IC1.86 IC1.87 IC1.88 IC1.90 IC1.91 IC1.93 IC1.94 IC1.97 IC1.98 IC1.112 IC1.113 IC1.115 IC1.116 IC1.117 IC1.120 IC1.121 IC1.122 IC1.123 IC1.124 IC1.125 IC1.126 IC1.127 IC1.133 IC1.134 IC1.136 IC1.137 IC1.138 IC1.139 IC1.142 IC2.3 IC2.10 IC3.A2 IC3.A5 IC3.B5 IC3.C2 IC3.C5 J2.1 J2.4 J2.5 J2.6 J2.8 J2.9 J2.10 J2.11 J3.1 J3.4 J3.5 J3.6 J3.8 J3.9 J3.10 J3.11 U1.4

## Polygon pours and split planes (outlines as drawn)
DGND on Ground Plane (split plane): 117.727,0.637 0.637,0.637 0.637,70.483 117.727,70.483
+3V3 on Power Plane (split plane): 117.727,0.637 0.637,0.637 0.637,70.483 117.727,70.483

## Silkscreen, mask and mechanical layers (free items; w line width, h text height)
Top Overlay:
  text "BoTi" at 11.176,39.116 h2

## Text inside footprints (layer, text, board x,y; h text height)
J2: Top Overlay "6" at 2.208,26.46 h1.5 r90; Top Overlay "9" at 2.208,34.77 h1.5 r90; Top Overlay "5" at 11.608,36.155 h1.5 r90; Top Overlay "1" at 11.608,25.325 h1.5 r90
J3: Top Overlay "6" at 116.056,25.483 h1.5 r270; Top Overlay "9" at 116.056,17.173 h1.5 r270; Top Overlay "5" at 106.656,15.788 h1.5 r270; Top Overlay "1" at 106.656,26.618 h1.5 r270
S1: Mechanical 16 "4" at 84.836,65.786 h1.97 r90; Mechanical 16 "3" at 84.836,57.658 h1.97 r90; Mechanical 16 "2" at 80.518,65.786 h1.97 r90; Mechanical 16 "1" at 80.391,57.912 h1.97 r90
SV1: Top Overlay "1" at 35.052,8.001 h1.97 r180; Top Overlay "2" at 35.052,5.461 h1.97 r180; Top Overlay "6" at 30.353,10.16 h1.97 r180
USB1: Top Overlay "GND" at 112.014,58.039 h0.39 r180; Top Overlay "ID" at 112.014,57.404 h0.39 r180; Top Overlay "D+" at 112.014,56.769 h0.39 r180; Top Overlay "D-" at 112.014,56.134 h0.39 r180; Top Overlay "V" at 112.014,55.372 h0.39 r180